# Altium PCB Flight Controller.PcbDoc (part 3 of 3)
Units mm, origin at the board's own origin, x right, y up, seen from the top; angles counter-clockwise.
Board outline 152.4 x 101.6 mm, 22 copper layers (F.Cu, F.Mask, B.Cu, B.Mask, In1.Cu, F.SilkS, In2.Cu, B.SilkS, In3.Cu, F.Adhes, In4.Cu, B.Adhes, F.Paste, B.Paste, Dwgs.User, Cmts.User, Eco1.User, Eco2.User, Edge.Cuts, Margin, B.CrtYd, F.CrtYd); 168 components, 0 nets, 572 pads, 361 vias.
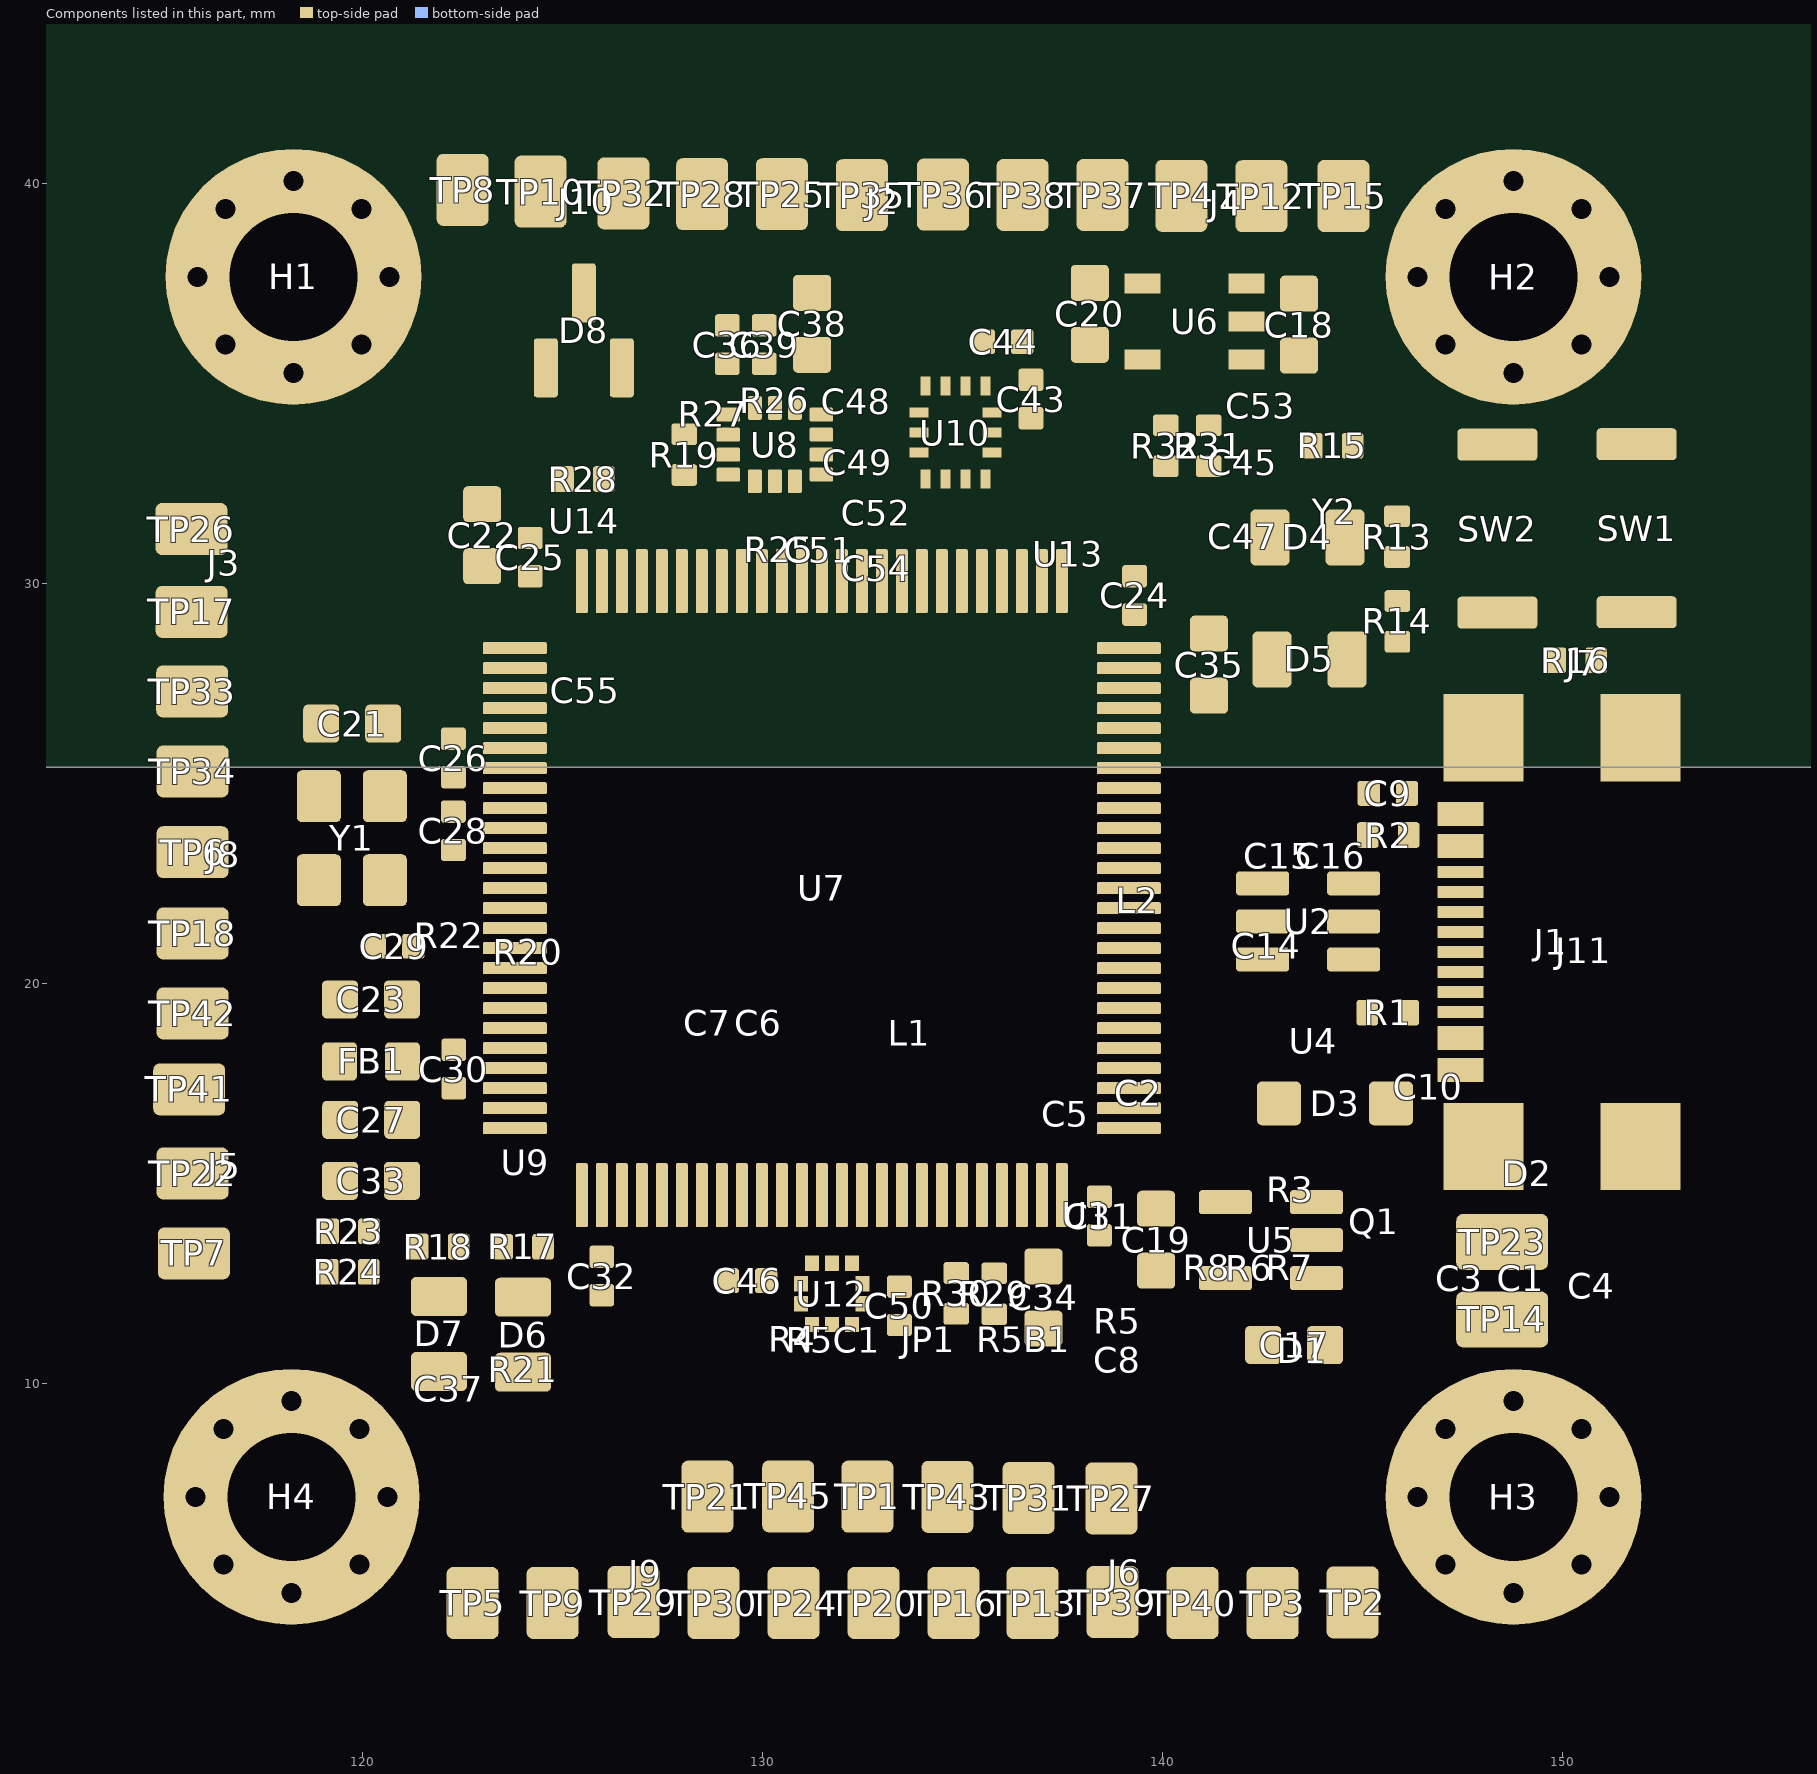
[diagram p14: the components of this part, seen from the top]

## Via types
v1: diameter 0.45, hole 0.25, F.Cu to B.Cu, tented both sides, 361 vias

## Nets (pads, with @x,y where several pads share a name; then routed paths per layer and width w, separated by ;. In a path a pad name is that pad's centre, name@x,y a point inside that pad or via, vN(x,y) a via of type N, cw(c..) or ccw(c..) an arc to the next point about the centre after c; other vN are vias at no path point) (continued)
copper on no net: | length 2032.2
  F.Cu w0.1: v1(122.15,16.82) 122.28,16.95 122.28,17.37 122.29,17.37 122.33,17.41 ; 129.06,12.49 129.13,12.56 ; v1(129.066,31.974) 129.066,32.636 129.14,32.71 ; v1(129.24,11.61) 129.72,11.13 130.88,11.13 131.215,11.465 131.23,11.465 ; v1(129.62,34.81) 129.805,34.625 129.805,34.375 130.305,34.375 ; v1(129.63,12.03) 129.92,11.74 130.73,11.74 130.965,11.975 130.965,11.98 ; 129.98,14.695 129.98,15.51 130.11,15.64 v1(130.11,15.83) ; 131.23,11.33 131.23,11.465 ; 131.23,12.995 131.23,12.9 131.57,12.56 131.96,12.56 132.23,12.83 132.23,12.995 ; 131.73,11.465 131.23,11.465 ; 133.42,12.41 v1(133.95,12.41) ; 134.62,12.97 134.84,12.75
  F.Cu w0.15: 115.665,17.34 116.25,17.34 v1(116.26,17.33) ; 115.74,27.29 116.31,27.29 117.18,26.42 117.18,24.27 v1(117.69,23.76) ; v1@115.75,19.24 115.81,19.24 v1(115.85,19.28) ; v1@115.75,25.29 115.81,25.29 v1(115.85,25.25) ; v1(118.02,14.92) 118.06,14.88 118.06,13.51 118.79,12.78 119.13,12.78 ; v1(118.32,15.96) 118.51,15.77 118.51,14.17 118.89,13.79 119.14,13.79 ; 120.15,12.78 120.16,12.79 ; 121.27,20.87 121.89,20.87 122.89,21.87 123.805,21.87 125.16,21.87 126,22.71 131.38,22.71 131.73,22.36 v1(133.46,22.36) ; 121.38,13.412 121.38,12.695 121.91,12.165 ; v1(121.84,32.91) 121.84,28.535 123.005,27.37 123.805,27.37 ; 122.27,25.145 122.27,24.285 122.685,23.87 123.805,23.87 124.65,23.87 v1(125.28,23.24) ; 122.4,13.412 122.4,13.66 125.051,16.311 126.261,16.311 126.85,16.9 128.34,16.9 129.48,15.76 129.48,14.695 ; 123.49,13.402 123.49,14.355 125.195,16.06 126.43,16.06 126.95,16.58 128.15,16.58 128.98,15.75 128.98,14.695 ; 123.805,19.87 125.7,19.87 126.13,20.3 126.13,21.69 126.5,22.06 130.49,22.06 130.7,21.85 v1(130.7,21.2) ; 123.805,25.37 124.57,25.37 126,23.94 v1(134.07,23.94) ; 123.805,26.37 124.55,26.37 126.57,24.35 132.64,24.35 133.28,24.99 134.01,24.99 134.15,24.85 v1(134.34,24.85) ; 123.805,26.87 124.68,26.87 126.86,24.69 132.06,24.69 132.96,25.59 v1(133.4,25.59) ; 123.805,28.37 124.78,28.37 125.07,28.08 125.07,27.1 127.14,25.03 131.76,25.03 132.83,26.1 135.37,26.1 v1(136.09,25.38) ; 123.815,20.86 123.805,20.87 125.44,20.87 125.73,21.16 125.73,21.82 126.3,22.39 131.14,22.39 131.504,22.026 v1(131.504,21.8) ; 124.01,12.145 124.01,12.9 124.51,13.4 124.51,13.402 ; v1(124.53,14.62) 124.66,14.75 124.66,15.14 125.26,15.74 126.33,15.74 126.48,15.59 126.48,14.695 ; v1(125.37,14.03) 125.48,14.14 125.48,14.695 ; 125.98,30.045 125.98,29.19 v1(126.02,29.15) ; v1(126.28,31.72) 126.76,31.72 127.48,31 127.48,30.045 ; 126.48,30.045 126.48,28.08 v1(126.84,27.72) ; v1(126.97,15.82) 126.97,14.705 126.98,14.695 ; 126.98,30.045 126.98,28.4 v1(127.77,27.61) ; v1(127.21,13.28) 127.69,13.28 127.98,13.57 127.98,14.695 ; v1(127.47,16.09) 127.48,16.08 127.48,14.695 ; 127.98,30.045 127.98,31.22 128.16,31.4 v1(128.31,31.4) ; 128.48,30.045 128.48,27.48 128.98,26.98 v1(129.62,26.98) ; 128.98,30.045 v1(128.98,31.39) ; v1(129.44,16.53) 130.6,16.53 130.99,16.14 130.99,14.705 130.98,14.695 ; 129.48,30.045 v1(129.48,31.07) ; v1(129.69,32) 129.69,32.14 129.805,32.255 129.805,32.545 ; v1(129.92,28.68) 129.92,28.57 130.2,28.29 130.73,28.29 131.48,29.04 131.48,30.045 ; 129.98,30.045 129.98,30.88 130.805,31.705 130.805,32.545 ; v1(130.02,17.06) 130.72,17.06 131.48,16.3 131.48,14.695 ; v1(130.07,33.18) 130.305,32.945 130.305,32.545 ; 130.48,30.045 130.48,30.87 131.47,31.86 131.47,32.71 ; v1(130.5,28.76) 130.71,28.76 130.98,29.03 130.98,30.045 ; 130.76,4.51 130.77,4.5 130.775,4.5 ; 131.57,34.11 131.47,34.21 132.17,34.91 132.17,35.49 v1(132.2,35.52) ; 131.98,14.695 131.98,15.5 v1(132.29,15.81) ; v1(132.01,22.87) 132.011,22.871 139.154,22.871 139.155,22.87 ; v1(132.45,27.44) 132.9,27.89 134.03,27.89 134.48,28.34 134.48,30.045 ; 132.495,12.565 132.495,12.655 132.87,13.03 134.56,13.03 134.62,12.97 ; 132.775,4.5 133,4.5 v1(133.01,4.51) ; 132.98,14.695 v1(132.98,15.72) ; v1(133.05,28.7) 133.48,29.13 133.48,30.045 ; v1(133.17,23.37) 139.155,23.37 ; v1(133.37,27.47) 133.41,27.51 134.11,27.51 134.98,28.38 134.98,30.045 ; v1(133.51,28.37) 133.98,28.84 133.98,30.045 134.06,29.965 ; 133.907,33.26 133.729,33.081 133.729,31.811 134.37,31.17 135.2,31.17 135.48,30.89 135.48,30.045 ; 133.907,33.76 133.53,33.76 133.17,34.12 133.17,35.84 133.3,35.97 133.62,36.29 134.19,36.29 134.55,36.29 134.7,36.14 134.83,36.01 v1(134.83,35.61) ; 133.907,34.26 133.66,34.26 133.46,34.46 133.46,35.47 133.47,35.48 133.73,35.74 133.97,35.74 134.07,35.74 v1(134.19,35.62) ; v1(133.97,15.73) 133.98,15.72 133.98,14.695 ; 134.07,32.597 134.07,31.89 134.5,31.46 135.45,31.46 135.98,30.93 135.98,30.045 ; v1(134.46,22.36) 137.3,22.36 137.79,21.87 139.155,21.87 ; 134.48,14.695 134.48,15.63 v1(134.7,15.85) ; v1@134.84,13.18 135.48,13.82 135.48,14.695 ; v1(135.11,21.87) 135.25,22.01 137.19,22.01 137.83,21.37 139.155,21.37 ; 135.53,36.03 135.57,35.99 ; 135.57,32.597 135.57,32.31 135.94,31.94 136.66,31.94 137.52,32.8 137.52,34.343 v1(137.59,34.413) ; v1(135.75,21.55) 135.8,21.6 136.48,21.6 136.47,21.6 137.12,21.6 137.85,20.87 139.155,20.87 ; 135.79,12.74 135.79,13.54 135.98,13.73 135.98,14.695 ; v1@135.834,34.26 135.732,34.26 135.915,34.26 v1(135.951,34.224) ; v1(136.1,17.07) 136.1,16.74 136.98,15.86 136.98,14.695 ; v1(136.33,27.055) 136.345,27.055 137.48,28.19 137.48,30.045 ; 136.48,30.045 136.48,31.15 138.05,32.72 138.05,34.813 137.843,35.02 v1(137.66,35.02) ; 136.49,36.03 136.71,35.81 136.71,35.08 136.71,35.07 v1(136.72,35.06) ; v1@136.5,39.7 136.5,38.99 137.29,38.2 139.77,38.2 140.41,37.56 140.41,34.85 140.08,34.52 140.08,33.94 ; v1(136.58,21.07) 137.23,21.07 137.39,20.91 137.93,20.37 139.155,20.37 ; v1@136.723,34.922 v1@136.8,35 ; v1(136.73,4.51) 136.74,4.5 v1@136.75,4.5 ; v1(137.66,23.88) 137.88,23.88 137.89,23.87 139.155,23.87 ; v1(137.81,26.47) 138.21,26.87 139.155,26.87 ; v1(137.87,19.86) 137.87,19.32 138.293,18.897 139.128,18.897 139.155,18.87 ; v1(137.927,18.697) 137.927,18.633 138.19,18.37 139.155,18.37 ; v1(138.031,22.319) 138.082,22.37 139.155,22.37 ; v1@138.5,39.7 138.5,38.96 138.92,38.54 140.003,38.54 140.84,37.703 140.84,34.25 141.15,33.94 ; 139.155,16.37 139.175,16.35 140.1,16.35 140.88,15.57 v1(140.88,15.52) ; 139.155,16.87 140.68,16.87 141.57,15.98 141.57,15.53 v1(141.56,15.52) ; 139.155,17.37 141.11,17.37 141.25,17.51 v1(141.32,17.51) ; 139.155,17.87 140.12,17.87 140.123,17.867 140.793,17.867 v1(140.8,17.86) ; 143.845,13.57 144.92,13.57 v1(145.23,13.88) ; 144.75,33.43 147.59,33.43 v1(147.61,33.45) ; 147.445,17.82 147.655,17.61 149.29,17.61 v1(149.3,17.6) ; 150.84,28.07 151.15,28.07 151.85,28.77 151.85,29.27 151.85,29.57 151.62,29.8 151.54,29.88 v1(151.04,29.88)
  F.Cu w0.157: 139.155,25.87 139.805,25.87 139.83,25.895 140.145,25.895 140.45,25.59 140.45,21.75 140.81,21.39 141.34,21.39 142.14,20.59 ; 139.155,26.37 139.805,26.37 139.83,26.345 140.217,26.345 140.81,25.752 140.81,21.9 140.96,21.75 141.4,21.75 142.14,22.49 142.502,22.49 ; 144.778,20.59 145.14,20.59 145.9,21.35 147.365,21.35 147.4,21.315 ; 144.778,22.49 145.14,22.49 145.92,21.71 147.385,21.71 147.445,21.77 148.27,21.77 148.49,21.55 148.49,21.04 148.22,20.77 147.445,20.77 ; 146.49,21.34 146.49,20.5 146.72,20.27 147.445,20.27
  F.Cu w0.2: v1(115.67,31.34) 115.68,31.35 v1@115.72,31.35 ; v1@115.725,29.28 115.725,29.345 v1(115.73,29.35) ; v1@115.75,21.24 v1(115.76,21.23) ; v1@115.78,13.24 115.804,13.24 v1(115.823,13.259) ; 118.905,22.57 119.495,23.16 v1(119.68,23.16) ; v1(118.96,26.5) 118.965,26.495 v1@118.965,26.485 ; 119.422,18.04 119.435,18.052 119.435,19.59 119.74,19.59 120.19,20.04 v1(120.19,20.21) ; 119.435,15.055 119.64,15.26 v1(119.64,15.31) ; 119.44,16.58 119.86,16.58 v1(120.07,16.37) ; v1@120.31,20.92 120.34,20.92 v1(120.37,20.89) ; 120.55,26.52 120.515,26.485 120.515,24.71 120.555,24.67 120.565,24.66 v1(121.49,24.66) ; 120.985,15.055 120.99,15.06 120.99,16.58 120.997,16.587 120.997,18.04 121.287,18.33 122.28,18.33 122.32,18.37 123.805,18.37 123.805,18.87 ; v1(121.39,10.3) 121.51,10.3 121.52,10.29 121.91,10.29 ; v1(122.02,23.42) 122.115,23.325 122.27,23.325 122.315,23.37 123.805,23.37 ; v1(122.13,15.43) 122.45,15.43 122.6,15.58 122.6,16.54 122.93,16.87 123.805,16.87 ; v1(122.28,26.64) 122.28,26.115 122.27,26.105 122.505,25.87 123.805,25.87 ; 122.99,31.97 v1(122.99,32.45) ; 123.24,30.17 122.99,30.42 123.935,30.42 124.19,30.165 125.11,30.165 125.36,30.165 125.48,30.045 ; 123.805,17.37 v1(126.12,17.37) ; 124.01,10.27 125.04,10.27 v1(125.3,10.53) ; 124.19,31.125 v1(124.19,32.65) ; v1(124.808,34.771) 124.939,34.771 125.295,34.415 125.295,33.365 125.01,33.08 125.01,32.6 ; v1(125.23,13.14) 125.245,13.155 125.98,13.155 125.98,14.695 ; 125.98,12.195 126.551,12.195 126.576,12.22 v1(126.81,12.22) ; 126.03,32.6 126.03,33.08 125.78,33.33 125.78,34.41 126.138,34.768 v1(126.283,34.768) ; v1(127.394,32.72) 127.414,32.7 128.04,32.7 ; v1@127.64,27.61 v1(127.77,27.61) ; 128.04,33.72 129.13,33.72 129.14,33.71 ; v1(128.26,12.63) v1@128.3,12.59 ; v1(128.28,13.24) 128.32,13.2 129.9,13.2 130.09,13.01 130.09,12.56 130.17,12.48 130.965,12.48 ; v1(128.6,7.13) 128.62,7.15 v1@128.62,7.16 ; 129.117,36.44 129.117,36.897 v1(129.12,36.9) ; 129.14,34.21 129.14,35.457 129.117,35.48 130.027,35.48 130.047,35.5 131.032,35.5 131.237,35.705 ; v1@130.04,36.44 130.04,36.47 v1(130.06,36.49) ; v1(130.3,6.53) 130.35,6.58 130.35,7.16 130.355,7.165 130.64,7.165 ; 130.805,34.375 130.805,34.515 131.237,34.947 131.237,35.705 ; v1(131.22,37.27) 131.235,37.255 v1@131.237,37.255 ; 131.73,12.995 131.73,13.32 131.86,13.45 133.92,13.45 v1(133.91,13.44) ; 132.495,12.48 132.495,12.565 ; 134.84,12.75 v1@134.84,13.18 ; 135.53,36.03 135.53,36.73 135.58,36.78 ; 135.57,35.99 135.57,34.922 135.908,34.922 136.71,34.12 136.71,33.57 136.4,33.26 135.732,33.26 ; v1(136.02,9.145) 136.086,9.145 136.645,8.586 136.645,7.135 136.65,7.13 ; 136.48,14.695 136.48,13.455 137.02,12.915 ; 137.02,11.365 137.02,11.47 137.225,11.675 v1(137.33,11.675) ; v1(137.37,37.53) 137.395,37.505 138.18,37.505 ; 137.72,27.7 138.39,28.37 139.155,28.37 ; 138.42,13.695 138.496,13.695 138.85,14.049 v1(138.85,14.066) ; v1(139.11,30.93) 139.3,30.74 139.3,30.17 ; 139.155,27.37 140.58,27.37 141.02,26.93 ; 139.5,35.59 138.545,35.59 138.18,35.955 137.355,36.78 135.58,36.78 ; v1(142.02,30.96) 142.2,31.14 142.683,31.14 ; 142.1,36.54 142.54,36.54 v1(142.58,36.5) ; 142.14,20.59 142.502,20.59 ; 142.47,39.67 v1(142.47,40.09) ; 142.502,21.54 142.813,21.54 143.51,20.843 143.51,18.92 143.87,18.56 145.69,18.56 ; 142.512,10.952 143.073,10.952 v1(143.1,10.98) ; v1(142.75,4.28) v1@142.75,4.5 ; v1(143.033,29.093) 142.733,28.792 142.733,28.09 142.76,28.09 143.23,27.62 143.23,26.27 143.27,26.23 v1(143.43,26.23) ; 143.315,35.59 143.41,35.685 144.965,35.685 145.39,35.26 v1(145.46,35.26) ; 143.41,37.235 143.41,36.705 v1(143.542,36.573) ; v1(143.72,33.85) 143.73,33.84 143.73,33.43 ; v1(144.41,24.87) 143.82,24.28 143.82,21.87 144.15,21.54 144.778,21.54 144.985,21.54 v1(145.14,21.695) ; 144.578,30.94 145.66,30.94 145.87,30.73 145.87,30.44 ; 144.608,28.19 144.948,28.53 145.87,28.53 ; 145.12,19.26 145.18,19.26 v1(146.09,20.17) ; 145.71,16.99 145.71,18.54 145.69,18.56 ; 146.08,19.08 146.08,19.2 146.14,19.26 146.14,19.52 146.39,19.77 147.445,19.77 ; 146.08,23.63 146.15,23.56 146.15,23.21 146.59,22.77 147.445,22.77 ; 146.15,24.78 148.83,24.78 148.99,24.62 148.99,23.8 148.61,23.42 ; 147.4,21.315 147.445,21.27 ; 147.445,18.62 147.385,18.56 145.69,18.56 ; 147.445,24.22 148.38,24.22 v1(148.39,24.23) ; 148.49,13.53 v1(148.49,14.29) ; v1@151.85,33.47 151.85,33.44 v1(151.86,33.43) ; 131.237,35.705 131.495,35.705 132.57,36.78 135.58,36.78
  F.Cu w0.3: 120.16,12.79 120.16,13.79 ; 120.555,22.57 122.66,22.57 122.96,22.87 123.805,22.87 ; 132.23,10.3 132.23,11.465 ; 132.495,11.98 132.495,11.73 132.23,11.465 ; 132.62,7.16 132.625,7.155 ; 133.42,11.45 132.245,11.45 132.23,11.465 ; 135.79,11.72 136.25,12.18 137.62,12.18 137.84,12.4 137.84,13.5 137.48,13.86 137.48,14.695 137.52,14.655 138.42,14.655 ; 146.11,24.74 146.15,24.78 ; 147.445,18.62 148.66,18.62 149.67,19.63 149.67,22.36 148.61,23.42 147.445,23.42
  F.Cu w0.4: 118.905,24.67 120.555,24.67 ; v1(127.83,25.43) 127.94,25.54 131.47,25.54 132.46,26.53 136.7,26.53 137.72,27.55 137.72,27.7 ; 139.155,28.37 139.1,28.425 139.1,28.88 139.77,29.55 140.06,29.55 ; 139.838,12.807 140.025,12.62 ; 141.15,32.92 140.08,32.92 140.08,29.57 140.06,29.55 ; 142.1,35.59 143.315,35.59 ; 142.77,16.85 142.91,16.99 ; 144.063,10.837 144.063,10.952 ; 145.87,31.46 147.13,31.46 147.36,31.23 v1(147.36,30.87) ; 149.82,28.07 149.82,28.98 149.54,29.26 148.37,29.26 147.98,29.65 140.16,29.65 140.06,29.55
  F.Cu w0.5: 132.625,7.155 134.62,7.155 ; 133.42,11.45 133.7,11.73 134.84,11.73 134.85,11.72 135.79,11.72 ; v1(140.47,39.68) 140.47,39.22 141.41,38.28 142.1,38.28 ; 142.1,37.49 142.1,38.28 ; v1(145.46,35.26) 145.44,35.26 144.69,36.01 144.69,37.66 144.07,38.28 142.1,38.28
  F.Cu w0.6: v1(127.57,12.71) 127.57,11.38 128.65,10.3 132.75,10.3 138.04,10.3 139.838,12.097 ; 138.72,7.115 138.955,7.115 139.838,7.997 139.838,12.097 ; 139.838,12.807 139.838,12.097 ; 140.025,12.62 141.57,12.62 ; 142.91,16.99 143.59,16.99 143.845,16.735 143.845,16.01 ; v1(143.77,9.66) 144.063,9.952 144.063,10.952 144.063,12.402 143.845,12.62 143.18,12.62 142.67,13.13 142.67,14.02 143.17,14.52 143.845,14.52 143.845,16.01 ; v1(144.97,16.02) 144.96,16.01 143.845,16.01
  F.Cu w1: v1(146.22,11.13) 146.22,11.15 146.66,11.59 148.49,11.59
  B.Cu w0.1: 134.57,31.6 134.7,31.73 135.235,31.73 v1@135.247,31.717 ; 134.73,31.72 134.732,31.717 v1@135.247,31.717 ; v1(135.35,31.86) 135.208,31.717 134.77,31.717 v1@135.247,31.717 ; v1(138.98,33.33) 138.98,33.14 139.103,33.017 140.51,33.017 ; v1(140.48,15.06) 142.12,15.06 142.33,14.85 142.33,13.56 142.16,13.39 143.18,13.39 ; 142.93,34.43 144.03,34.43 v1(144.04,34.42) ; 143.44,32.9 143.44,33.57 v1(143.72,33.85) ; v1@148.528,20.3 148.578,20.3 v1(148.588,20.31) ; 148.528,21.3 148.905,21.3 v1(148.915,21.31)
  B.Cu w0.15: v1(117.69,23.76) 117.73,23.72 118.322,23.72 ; v1(117.98,24.7) 118,24.72 118.47,24.72 ; v1(118.06,16.94) 118.08,16.92 118.48,16.92 ; 118.322,22.72 117.8,22.72 115.85,24.67 v1(115.85,25.25) 116.4,25.8 117.16,25.8 123.6,32.24 128.29,32.24 130.11,34.06 130.3,34.06 ; 118.332,14.92 117.28,14.92 115.86,16.34 115.86,19.29 117.21,20.64 118.87,20.64 120.44,22.21 120.44,28.52 123.62,31.7 126.26,31.7 v1(126.28,31.72) ; v1@118.332,15.92 117.13,15.92 116.26,16.79 116.26,19.03 117.43,20.2 119.09,20.2 120.85,21.96 120.85,28.3 123.77,31.22 128.11,31.22 128.29,31.4 v1(128.31,31.4) ; v1@118.47,32.01 118.49,32.01 v1(118.52,32.04) ; v1@120.46,13.92 v1(120.51,13.87) ; 122.15,9.13 122.15,8.85 v1(122.16,8.84) ; 122.165,18.72 122.81,18.075 122.81,16.99 124.53,15.27 v1(124.53,14.62) ; 122.165,19.13 122.17,19.135 122.17,20.68 122.165,20.675 ; v1(122.17,21.75) 122.17,21.7 122.71,21.7 123.63,20.78 123.63,20.6 ; 123.4,29.01 123.34,29.07 123.34,29.69 124.36,30.71 ; 123.435,11.51 123.66,11.51 124.08,11.09 124.08,10.49 124.23,10.34 124.53,10.34 ; 123.435,18.72 123.45,18.705 123.45,17.18 124.37,16.26 127.3,16.26 v1(127.47,16.09) ; 124.38,30.71 127.37,30.71 128.09,29.99 128.09,28.73 128.93,27.89 132.95,27.89 v1(133.37,27.47) ; 124.65,20.78 124.65,18.775 124.705,18.72 ; 124.705,11.51 124.705,14.195 126.21,15.7 126.33,15.82 v1(126.97,15.82) ; 125.975,11.51 125.975,12.845 126.41,13.28 v1(127.21,13.28) ; v1(126.08,28.64) 126.08,28.97 v1@126.18,29.07 ; 126.18,27.46 126.04,27.32 126.41,26.95 v1(126.86,26.95) ; 126.445,6.96 126.55,7.065 126.55,10.19 128.83,12.47 128.83,15.6 129.44,16.21 v1(129.44,16.53) ; 127.4,34.02 127.7,33.72 128.76,33.72 ; 127.45,29.07 127.45,28.82 128.83,27.44 v1(132.45,27.44) ; 127.695,6.96 127.695,10.745 129.17,12.22 129.17,15.47 130.02,16.32 v1(130.02,17.06) ; v1(128.49,39.51) 128.49,39.28 129.13,38.64 132.33,38.64 132.5,38.47 132.5,37.607 ; 130.42,30.34 131.54,29.22 v1(131.54,28.45) ; 131.77,11.59 131.77,11.99 132.19,12.41 v1(133.95,12.41) ; v1(132.04,28.84) 132.36,29.16 132.36,30.37 ; 132.36,31.76 v1(132.36,33.8) ; v1@132.45,40.01 v1(132.46,40.02) 133.71,40.02 134.53,39.2 135.75,39.2 136.35,38.6 139.84,38.6 140.08,38.36 140.08,37.56 ; v1(132.55,28.43) 132.53,28.45 132.53,28.78 133.508,29.757 134.77,29.757 ; v1(133.4,25.59) 133.67,25.86 136.84,25.86 137.05,26.07 141.37,26.07 141.81,26.51 141.81,28.09 141.443,28.457 140.51,28.457 ; v1(133.91,13.44) 133.951,13.481 135.509,13.481 v1(135.79,13.2) ; 133.997,29.107 134.77,29.107 135.618,29.107 135.92,29.41 135.92,30.71 ; v1(134.07,23.94) 134.78,24.65 137.29,24.65 137.79,25.15 141.79,25.15 142.82,26.18 142.82,28.74 141.152,30.407 140.51,30.407 ; v1(134.34,24.85) 134.5,24.85 134.55,24.9 136.98,24.9 137.58,25.5 141.67,25.5 142.48,26.31 142.48,28.45 141.172,29.757 140.51,29.757 ; v1(134.45,40.07) 134.88,39.64 135.8,39.64 136.54,38.9 140.64,38.9 141.08,38.46 141.08,37.56 ; v1(134.99,8.6) 134.99,8.5 135.46,8.03 135.56,7.93 135.56,7.14 ; v1(136.07,8.56) 136.07,8.22 136.56,7.73 136.56,7.14 ; v1(136.09,25.38) 136.28,25.57 136.904,25.57 137.094,25.76 141.47,25.76 142.14,26.43 142.14,28.16 141.21,29.09 140.527,29.09 140.51,29.107 ; v1(136.46,39.71) 136.59,39.71 137.11,39.19 141.45,39.19 142.08,38.56 142.08,37.56 ; v1(137.07,8.62) 137.56,8.13 137.56,7.14 ; 137.14,15.337 137.14,15.77 137.241,15.871 v1(137.241,16.095) ; v1(138.02,8.55) 138.56,8.01 138.56,7.14 ; v1(138.49,39.61) 138.49,40.13 139.26,40.9 140.84,40.9 143.08,38.66 143.08,37.56 ; 139.56,7.14 139.56,8.13 140.19,8.76 140.19,10.34 140.46,10.61 140.46,11.3 v1(140.49,11.33) ; v1(139.59,14.27) v1@139.6,14.26 ; 141.13,12.41 142.12,12.41 142.16,12.37 ; v1@141.54,7.205 141.54,7.05 v1(141.57,7.02) ; 142,33.5 142.12,33.5 142.52,33.1 v1(142.52,33.02) ; 142.01,30.69 142.01,30.42 v1(142.12,30.31) ; v1(142.02,9.86) 142.038,9.877 142.038,10.81 ; v1(146.49,27.74) 146.53,27.7 148.36,27.7 148.562,27.498 ; v1(146.54,28.47) 148.534,28.47 148.562,28.498
  B.Cu w0.2: v1(117.45,29.97) 117.47,29.95 118.443,29.95 ; v1(117.47,30.95) 118.443,30.95 ; 118.443,28.95 119.1,28.95 119.7,29.55 v1(120.06,29.55) ; v1(121.58,33.8) 121.58,36.38 122.797,37.597 124.08,37.597 124.09,37.607 124.09,37.745 ; v1(122.16,14.25) 122.165,14.245 122.165,10.495 122.36,10.3 123.47,10.3 123.51,10.34 ; v1(122.32,27.29) 122.35,27.32 125.08,27.32 124.92,27.48 124.92,30.13 v1(124.91,30.14) ; v1(124.27,7.45) 124.27,7.41 124.57,7.11 ; v1(124.808,34.771) 125.021,34.771 125.365,35.115 125.365,36.315 125.09,36.59 125.09,37.607 ; 124.96,37.985 124.965,37.99 124.965,37.44 ; v1@125.57,7.2 125.57,7.21 v1(125.59,7.23) ; 126.09,37.565 126.09,37.607 126.09,36.59 125.8,36.3 125.8,35.17 126.202,34.768 v1(126.283,34.768) ; 130.3,35.08 131.255,35.08 131.565,34.77 131.565,33.3 131.605,33.26 ; 130.74,10.58 130.74,10.27 131.44,9.57 138.69,9.57 139.345,10.225 139.345,10.58 139.37,10.605 139.37,11.54 ; v1(130.78,33.43) 130.62,33.27 130.62,32.32 130.42,32.12 130.42,31.36 130.47,31.41 131.42,31.41 ; 131.42,30.35 132.18,31.11 134.718,31.11 134.77,31.057 ; 131.77,10.57 131.77,10.74 132.11,11.08 132.84,11.08 ; 133.115,34.77 133.115,34.565 134.013,33.667 134.77,33.667 ; 133.155,33.26 133.155,33.255 133.392,33.017 134.77,33.017 ; v1(133.3,31.75) 133.39,31.75 134.007,32.367 134.77,32.367 135.772,32.367 135.92,32.22 135.92,30.71 135.618,30.407 134.77,30.407 133.358,30.407 133.32,30.37 ; 134.14,11.08 134.14,10.44 134.62,9.96 138.13,9.96 138.385,10.215 138.385,10.58 138.385,11.505 138.35,11.54 138.35,11.76 139.04,12.45 139.04,13.062 ; 135.44,11.08 136.02,11.08 136.53,10.57 ; 137.02,16.64 136.7,16.64 136.33,16.27 136.33,13.67 136.938,13.062 137.14,13.062 ; 140.51,31.717 141.813,31.717 141.98,31.55 ; 140.51,32.367 141.827,32.367 142,32.54 142.21,32.54 142.89,31.86 144.79,31.86 145.14,32.21 145.14,32.9 ; 140.51,33.667 141.208,33.667 141.97,34.43 ; 141.1,13.4 141.198,13.4 v1(141.67,13.872) ; 142.01,31.64 142.24,31.64 143.18,30.7 143.44,30.7 ; v1(142.05,17.69) 142.148,17.592 142.623,17.592 143.242,17.592 143.71,18.06 v1(143.71,18.15) ; 143.19,14.33 145.08,14.33 v1(145.23,14.48) ; v1(143.77,28.87) v1@143.782,28.857 ; 145.14,30.7 145.14,30.22 v1(145.15,30.21) ; v1(147,12.55) 147.42,12.13 147.42,11.845 ; 148.562,26.498 149.992,26.498 v1(150.44,26.05) ; 148.588,19.31 149.38,19.31 v1(149.74,18.95) ; 148.95,11.85 148.97,11.85 149.47,12.35 v1(149.95,12.35) ; v1@150.71,11.485 150.71,11.47 v1(150.75,11.43)
  B.Cu w0.3: v1(115.75,15.29) 116.01,15.29 116.11,15.19 117.38,13.92 118.48,13.92 v1@120.46,13.92 ; 129.56,7.12 129.57,7.11 ; v1(130.95,18.55) 131.15,18.55 131.28,18.42 ; v1(138.033,17.998) 138.291,17.74 139.09,17.74 ; 142.623,19.492 142.783,19.492 143.365,20.075 143.365,20.93 ; 144.33,15.28 144.36,15.25 ; v1@145.23,15.25 v1(145.24,15.24) ; v1(145.63,16.07) 146.195,16.635 146.64,16.635 ; v1(146.7,30.82) v1@146.71,30.83
  B.Cu w0.4: 148.488,29.5 148.488,29.882 148.49,29.885 v1(148.49,30.12)
  B.Cu w0.5: 128.61,19.785 128.645,19.82 ; v1(130.48,39.71) 130.48,39.53 130.63,39.38 133.42,39.38 134.48,38.32 134.48,37.627 134.5,37.607 ; 139.04,15.337 139.39,15.687 139.39,16.78 ; 141.97,34.43 141.97,34.88 142.25,35.16 145.36,35.16 v1(145.46,35.26) ; 143.19,15.35 143.26,15.28 144.33,15.28 ; 144.36,15.25 v1@145.23,15.25 ; 146.23,15.28 146.26,15.25 ; 147.42,13.395 147.43,13.385 ; v1(149.93,15.25) 150.76,15.25
  B.Cu w0.6: 144.08,37.56 144.09,37.57 144.31,37.57 144.68,37.2 144.68,36.02 146.71,33.99 v1(146.71,32.18) v1@146.71,30.83
  B.Cu w0.7: 128.61,18.235 130.635,18.235 v1(130.95,18.55) 130.96,18.54 130.96,11.82 130.74,11.6 130.3,11.6 129.66,10.96 129.66,9.53 v1(129.69,9.5) 129.645,9.455 129.645,7.205 129.56,7.12 ; 135.71,18.42 136.595,18.42 137.98,17.035 138.09,16.925 138.09,15.337 ; 139.81,20.18 139.81,20.04 ; 139.82,20.03 139.81,20.04 ; 139.9,19.95 139.81,20.04 ; 141.805,20.94 141.815,20.93 ; 141.84,20.94 141.85,20.93 ; 144.898,17.592 144.96,17.53 ; 146.26,15.25 147.46,15.25 147.42,15.21
  B.Cu w0.8: v1(115.73,23.18) 117.19,21.72 118.47,21.72 ; 139.81,24.1 139.92,23.99 v1(142.9,23.99) v1(144.3,23.99) 146.907,23.99 148.588,22.31 ; v1(141.48,22.69) 141.48,22.657 141.732,22.405 142.9,22.405 ; 144.2,22.405 145.535,22.405 145.82,22.69 v1(145.82,22.7) ; v1(144.783,19.861) 144.898,19.746 144.898,19.492 ; 144.898,17.592 144.898,18.542
  B.Cu w1: 139.39,16.78 139.63,16.54 144.08,16.54 144.898,17.357 144.898,17.592 145.543,17.592 146.135,18.185 146.64,18.185 147.595,18.185 148.1,17.68 148.1,15.89 147.46,15.25 ; 139.82,20.03 140.915,20.03 ; 141.815,20.93 140.915,20.03 ; 142.623,18.542 141.752,18.542 141.26,19.035 141.26,19.685 140.915,20.03 ; 147.42,13.395 147.42,15.21 ; 147.43,13.385 150.71,13.385
  F.SilkS w0.254: 114.882,22.472 116.532,22.472 116.782,22.722 116.782,26.622 116.782,29.872 116.582,30.072 114.982,30.072 ; 125.75,40.6 125.75,38.95 126,38.7 127.9,38.7 131.15,38.7 131.35,38.9 131.35,40.5 ; 131.7,40.6 131.7,39.1 131.7,38.9 131.9,38.7 140.1,38.7 140.9,38.7 141.1,38.7 141.3,39 141.3,40.6 ; 121.68,17.3 121.69,18.77 118.76,18.77 118.76,17.35 121.68,17.3 ; 121.68,17.3 118.75,17.3 118.75,15.88 121.68,15.88 121.68,17.3 ; 118.74,14.36 118.74,15.78 121.67,15.78 121.67,14.36 118.74,14.36 ; 118.75,18.89 118.75,20.31 121.68,20.31 121.68,18.89 118.75,18.89 ; 122.29,29.73 123.71,29.73 123.71,32.66 122.29,32.66 122.29,29.73 ; 130.53,35.035 131.95,35.035 131.95,37.965 130.53,37.965 130.53,35.035 ; 136.32,10.68 137.74,10.68 137.74,13.61 136.32,13.61 136.32,10.68 ; 137.48,35.265 138.9,35.265 138.9,38.195 137.48,38.195 137.48,35.265 ; 139.13,12.1 140.55,12.1 140.55,15.03 139.13,15.03 139.13,12.1 ; 140.45,26.49 141.87,26.49 141.87,29.42 140.45,29.42 140.45,26.49 ; 141.84,10.24 141.84,11.66 144.77,11.66 144.77,10.24 141.84,10.24 ; 142.71,35 144.13,35 144.13,37.93 142.71,37.93 142.71,35
  In2.Cu w0.15: v1(117.45,29.97) 118.17,30.69 120.51,30.69 125.07,26.13 136.89,26.13 137.23,26.47 v1(137.81,26.47) ; v1(117.47,30.95) 117.53,31.01 120.67,31.01 125.27,26.41 135.7,26.41 136.33,27.04 v1(136.33,27.055) ; v1(117.69,23.76) 117.72,23.73 118.27,23.73 120.87,21.13 120.87,16.69 v1(122.13,15.43) ; 121.84,32.96 v1(121.84,32.91) 122.21,33.28 122.21,34.37 123.15,35.31 131.99,35.31 v1(132.2,35.52) ; v1(126.81,4.6) 126.81,4.66 128.046,5.896 128.446,5.896 132.76,10.21 140.46,10.21 140.89,10.64 140.89,15.51 v1(140.88,15.52) ; v1(126.84,27.72) 126.67,27.89 126.67,31.43 129.61,34.37 131.71,34.37 133.01,35.67 133.01,39.61 132.6,40.02 v1(132.46,40.02) ; v1(127.77,27.61) 127.07,28.31 127.07,31.14 129.89,33.96 131.81,33.96 134.49,36.64 134.49,40.03 v1(134.45,40.07) ; v1(128.72,4.55) 129.73,5.56 130.08,5.56 134.3,9.78 140.56,9.78 141.27,10.49 141.27,15.23 v1(141.56,15.52) ; v1(128.98,31.39) 129.1,31.51 131.65,31.51 136.58,36.44 136.58,39.59 v1(136.46,39.71) ; v1(129.48,31.07) 131.79,31.07 138.49,37.77 v1(138.49,39.61) ; v1(129.62,26.98) 129.7,26.9 132.69,26.9 133.87,26.9 135,28.03 135.28,28.31 135.28,30.12 135.28,30.59 136.29,31.6 136.61,31.92 139.72,31.92 140.14,31.92 141.44,33.22 141.64,33.42 144.88,33.42 147.58,33.42 v1(147.61,33.45) ; v1(130.7,21.2) 131.85,21.2 132.8,20.25 132.8,18.5 136.13,15.17 139.73,15.17 140.19,14.71 140.19,11.63 v1(140.49,11.33) ; v1(131.504,21.8) 131.996,21.8 133.3,20.496 133.3,18.65 136.27,15.68 140.03,15.68 140.48,15.23 v1(140.48,15.06) ; 148.548,20.35 v1(148.588,20.31)
  In2.Cu w0.3: v1(115.73,23.18) 115.72,23.17 115.74,23.17 ; v1(145.24,15.24) 145.25,15.25
  In2.Cu w0.5: v1(130.48,39.71) 130.48,40.27 131.01,40.8 139.35,40.8 v1(140.47,39.68) ; 145.25,15.25 145.32,15.18 149.86,15.18 v1(149.93,15.25)
  In2.Cu w0.6: 133.27,31.67 134.17,32.57 139.75,32.57 v1(141.97,34.79) ; v1(133.77,7.155) 135.115,5.81 141.61,5.81 143.77,7.97 v1(143.77,9.66)
  In2.Cu w0.8: 115.74,23.17 117.195,21.715 117.195,13.335 119.135,11.395 126.935,11.395 128.83,9.5 v1(129.69,9.5)
  B.SilkS w0.254: 141.56,32.1 142.46,32.1 ; 141.56,33.95 143.34,33.95 143.34,34.88 141.56,34.88 141.56,30.28 142.46,30.27 142.46,33.95 ; 149.66,14.09 151.69,14.12 151.69,10.74 149.74,10.74 149.66,14.09 ; 149.66,14.09 149.66,11.16 148.24,11.16 148.24,14.09 149.66,14.09 ; 121.715,8.71 122.605,8.71 122.605,10.52 121.715,10.52 121.715,8.71 ; 124.66,26.875 126.47,26.875 126.47,27.765 124.66,27.765 124.66,26.875 ; 127.91,17.55 129.33,17.55 129.33,20.48 127.91,20.48 127.91,17.55 ; 129.17,17.55 130.59,17.55 130.59,20.48 129.17,20.48 129.17,17.55 ; 146.71,11.16 148.13,11.16 148.13,14.09 146.71,14.09 146.71,11.16
  In3.Cu w0.1: v1(129.63,12.03) 129.64,12.04 129.64,15.53 129.9,15.79 130.07,15.79 v1(130.11,15.83) ; v1(140.8,17.86) 140.902,17.962 140.902,18.652 143.57,21.32 148.905,21.32 v1(148.915,21.31) ; v1(141.32,17.51) 141.32,18.41 143.84,20.93 147.85,20.93 148.47,20.31 v1(148.588,20.31)
  In3.Cu w0.15: v1(122.65,39.53) 122.74,39.53 123.58,38.69 123.58,25.72 125.93,23.37 v1(133.17,23.37) ; v1(122.76,4.73) 122.76,19.62 126.01,22.87 v1(132.01,22.87) ; v1(129.69,32) 129.91,31.78 129.91,28.7 129.92,28.69 v1(129.92,28.68) ; v1(130.07,33.18) 130.31,32.94 130.31,28.95 v1(130.5,28.76) ; v1(130.76,4.76) 130.75,4.77 130.75,16.82 131.56,17.63 131.56,19.19 134.46,22.09 v1(134.46,22.36) ; v1(132.29,15.81) 132.18,15.7 132.18,9.54 133.12,8.6 v1(134.99,8.6) ; v1(132.98,15.72) 132.98,15.67 132.62,15.31 132.62,9.8 133.29,9.13 135.37,9.13 135.94,8.56 v1(136.07,8.56) ; v1(133.01,4.51) 132.25,4.51 131.07,5.69 131.07,16.71 131.93,17.57 131.93,19.13 134.67,21.87 v1(135.11,21.87) ; v1(133.05,28.7) 133.52,29.17 133.53,29.17 134.01,29.65 134.01,35.44 v1(134.19,35.62) ; v1(133.46,22.36) 134.03,22.93 138.57,22.93 139.52,23.88 139.52,26.48 142.67,29.63 150.79,29.63 v1(151.04,29.88) ; v1(133.51,28.37) 135.86,28.37 137.59,30.1 v1(137.59,34.413) ; v1(133.97,15.73) 133.97,15.7 133.06,14.79 133.06,10.32 133.75,9.63 136.12,9.63 137.07,8.68 v1(137.07,8.62) ; v1(134.7,15.85) 134.48,15.63 134.48,15.62 133.49,14.63 133.49,10.53 133.92,10.1 136.39,10.1 137.94,8.55 v1(138.02,8.55) ; v1(134.78,4.78) 134.64,4.78 134.35,5.07 132.27,5.07 131.45,5.89 131.45,16.6 132.27,17.42 132.27,18.92 134.69,21.34 135.54,21.34 v1(135.75,21.55) ; v1(134.83,35.61) 137.07,35.61 v1(137.66,35.02) ; v1(134.84,13.08) 138.74,9.18 138.74,5.82 138.74,4.57 v1(138.75,4.56) ; v1(135.79,13.2) 135.79,12.65 139.09,9.35 139.09,5.95 140.49,4.55 v1(140.73,4.55) ; v1(136.58,21.07) 134.89,21.07 132.61,18.79 132.61,17.26 131.76,16.41 131.76,6.06 132.44,5.38 135.86,5.38 v1(136.73,4.51) ; v1(137.66,23.88) 137.65,23.89 137.65,25.04 138.46,25.85 138.46,34.65 143.5,39.69 v1(144.48,39.69) ; v1(137.87,19.86) 139.353,19.86 140.31,20.817 140.31,25.57 143.21,28.47 v1(146.54,28.47) ; v1(137.927,18.697) 137.927,18.811 138.226,19.11 139.26,19.11 140.75,20.6 140.75,25.24 143.41,27.9 146.33,27.9 v1(146.49,27.74) ; v1(138.031,22.319) 137.47,21.758 137.47,16.63 137.79,16.31 137.79,11.786 144.71,4.866 v1(144.71,4.63)
  In3.Cu w0.2: v1(124.27,7.45) 124.221,7.499 124.221,8.781 126.01,10.57 126.01,17.26 v1(126.12,17.37) ; v1(128.49,39.51) 128.49,36.88 130.78,34.59 130.78,33.506 130.704,33.43 v1(130.78,33.43)
  Edge.Cuts w0.254: 113.22,7.155 ccw(c118.22,7.155) 118.22,2.155 148.795,2.155 ccw(c148.795,7.155) 153.795,7.155 153.77,37.63 ccw(c148.77,37.63) 148.77,42.63 118.295,42.655 ccw(c118.295,37.655) 113.295,37.655 113.22,7.155
  other v1: 124.75,4.5 130.33,8.74 120.09,10.55 120.71,10.54 118.06,11.22 128.89,11.23 152.19,11.4 152.74,11.43 117.68,11.67 152.19,11.98 152.74,11.98 117.29,12.07 116.91,12.44 152.19,12.55 152.73,12.55 152.18,13.14 152.71,13.14 130.17,13.53 152.19,13.73 152.75,13.73 128.05,15.93 132.73,16.49 133.29,16.49 133.85,16.49 133.02,17.07 133.58,17.07 129.04,17.09 143.89,17.61 118.06,17.97 130.95,18.01 127,18.2 127.6,18.2 118.06,18.53 140.4,18.6 127,18.9 127.6,18.9 130.95,19.05 118.06,19.09 137.06,19.17 127,19.5 127.6,19.5 121.31,19.57 130.95,19.55 118.07,19.63 137.04,19.79 152.18,20.04 151.49,20.06 137.06,20.39 152.19,20.6 151.5,20.62 126.66,20.79 127.31,20.79 128.01,20.79 128.71,20.79 129.46,20.79 152.19,21.17 151.5,21.19 126.66,21.44 127.31,21.44 128.01,21.44 128.71,21.44 129.46,21.44 151.51,21.75 152.2,21.73 121.33,21.77 150.44,22.71 150.45,23.27 121.44,23.43 150.98,23.81 150.45,23.84 134.8,23.9 135.4,23.9 136,23.9 136.6,23.9 115.59,24.31 150.98,24.38 116.76,24.41 150.46,24.4 135.45,25.3 150.43,25.48 145.04,25.69 145.74,25.69 145.03,26.25 145.73,26.25 145.01,26.85 145.71,26.85 127.49,26.94 128.11,26.96 143.782,27.162 117.67,27.33 136.31,27.72 118.15,27.74 119.95,27.75 118.58,28.11 136.32,28.21 136.89,28.27 138.01,28.63 129.3,28.7 136.9,28.76 138.02,29.12 150.54,30.91 151.16,30.91 121.37,31.02 150.53,31.47 151.15,31.47 150.51,32.07 151.13,32.07 116.87,32.92 117.5,32.92 118.13,32.92 118.76,32.92 132.38,33.19 119.7,33.5 116.88,33.55 117.51,33.55 118.14,33.55 118.77,33.55 139,33.83 139.28,34.35 139.29,34.84 128.13,35.94 139.59,36.345 128.14,36.44 138.22,36.75 135.39,37.3 136.035,37.3 129.475,37.54 130.12,37.54 135.39,37.78 136.035,37.78 129.485,38.19 130.13,38.19 135.39,38.37

## Polygon pours and split planes (outlines as drawn)
no net on F.Cu "F.Cu-" (solid, remove dead copper, pour order 6): 112,42 118.27,45 149,45 155,42 155,5 151,1 118.27,1 112,4
no net on In3.Cu "In3.Cu-" (solid, remove dead copper, pour order 13): 111,43 118.27,46 149,46 155,43 155,3 151,0 118,0 111,3 111,4
no net on B.Cu "B.Cu--1" (solid, remove dead copper, pour order 10): 142.3,6.3 144.3,6.3 145.1,8 145.1,9.5 145.5,9.9 146,9.9 146.5,10.6 146.5,13.3 146.2,13.5 144.8,13.5 144.2,12.9 143,12.9 142.7,12.7 142.7,12.1 143,11.9 143.4,11.9 143.7,11.6 143.7,10.3 142.7,9.2 142.3,9.2 142.1,9 142.1,6.5
no net on B.Cu "B.Cu-" (solid, remove dead copper, pour order 9): 112,42 118.27,45 149,45 155,42 155,5 151,1 118.27,1 112,4
no net on In4.Cu "In4.Cu-" (solid, remove dead copper, pour order 14): 111,43 118.27,46 149,46 155,43 155,3 151,0 118,0 111,3 111,4
no net on In1.Cu "In1.Cu-" (solid, remove dead copper, pour order 11): 111,43 118.27,46 149,46 155,43 155,3 151,0 118,0 111,3 111,4
no net on In2.Cu "In2.Cu--2" (solid, remove dead copper, pour order 8): 119.32,34.265 128.72,34.265 128.75,12.345 119.35,12.345
no net on In2.Cu "In2.Cu--1" (solid, remove dead copper, pour order 7): 141.9,32.72 150.115,32.715 150.085,15.565 141.825,15.57
no net on In2.Cu "In2.Cu-" (solid, remove dead copper, pour order 12): 111,43 118.27,46 149,46 155,43 155,3 151,0 118,0 111,3 111,4

## Other copper
F.SilkS:
  text "M3" at 121.63,40.947 h0.5
  text "GND" at 123.43,40.948 h0.5
  text "GND" at 125.43,40.948 h0.5
  text "VIDEO" at 127.43,40.948 h0.5
  text "5V" at 130.1,40.949 h0.5
  text "RX" at 131.91,40.951 h0.5
  text "TX" at 134.05,40.951 h0.5
  text "SDA" at 135.769,40.948 h0.5
  text "SCL" at 137.65,40.948 h0.5
  text "5V" at 139.93,40.949 h0.5
  text "GND" at 141.73,40.948 h0.5
  text "M4" at 143.83,40.95 h0.5
  text "CAM" at 127.59,37.798 h0.5
  text "GPS" at 135.63,37.798 h0.5
  text "PWR" at 143,32.047 h0.4
  text "GND" at 114.692,30.8 h0.5 r90
  text "GND" at 114.692,28.6 h0.5 r90
  text "BOOT" at 147.56,27.916 h0.4
  text "RST" at 151.38,27.876 h0.4
  text "PWR" at 144.44,27.047 h0.4
  text "IRC" at 114.692,26.7 h0.5 r90
  text "VTX" at 117.544,25.522 h0.4 r90
  text "VIDEO" at 114.692,24.25 h0.5 r90
  text "VCC" at 114.692,22.55 h0.5 r90
  text "GND" at 114.692,20.4 h0.5 r90
  text "SDA" at 114.692,18.45 h0.5 r90
  text "SCL" at 114.692,16.6 h0.5 r90
  text "3.3V" at 114.693,14.45 h0.5 r90
  text "GND" at 150.704,12.87 h0.4 r90
  text "GND" at 114.692,12.45 h0.5 r90
  text "VBAT" at 150.713,10.77 h0.4 r90
  text "STS2" at 122.62,9.433 h0.4
  text "STS1" at 124.72,9.433 h0.4
  text "GND" at 129.34,6.038 h0.5
  text "GND" at 131.34,6.038 h0.5
  text "5V" at 133.04,6.039 h0.5
  text "5V" at 135.04,6.039 h0.5
  text "GND" at 137.5,6.038 h0.5
  text "3.3V" at 139.62,6.037 h0.5
  text "M2" at 123.346,3.171 h0.5
  text "GND" at 125.51,3.169 h0.5
  text "TX" at 127.23,3.173 h0.5
  text "RX" at 129.3,3.173 h0.5
  text "S4" at 131.335,3.169 h0.5
  text "S3" at 133.385,3.168 h0.5
  text "S2" at 135.385,3.169 h0.5
  text "S1" at 137.335,3.169 h0.5
  text "SCL" at 139.54,3.169 h0.5
  text "SDA" at 141.54,3.169 h0.5
  text "GND" at 143.51,3.169 h0.5
  text "M1" at 145.344,3.173 h0.5
B.SilkS:
  text "GND" at 131.972,36.87 h0.5 r90
  text "5V" at 134.991,36.81 h0.5 r90
  text "C_L" at 125.557,36.785 h0.5 r90
  text "C_H" at 126.597,36.775 h0.5 r90
  text "GND" at 127.562,36.775 h0.5 r90
  text "3.3V" at 124.559,36.764 h0.5 r90
  text "VID" at 132.971,36.76 h0.5 r90
  text "RX" at 140.549,36.765 h0.5 r90
  text "GND" at 139.472,36.73 h0.5 r90
  text "SDA" at 142.512,36.74 h0.5 r90
  text "SCL" at 143.532,36.74 h0.5 r90
  text "5V" at 144.561,36.74 h0.5 r90
  text "TX" at 141.649,36.71 h0.5 r90
  text "GND" at 119.315,32.143 h0.5
  text "CLK" at 119.32,31.158 h0.5
  text "DIO" at 119.32,30.158 h0.5
  text "3V3" at 119.35,29.147 h0.5
  text "5V" at 147.72,29.059 h0.5
  text "TX" at 147.69,28.011 h0.5
  text "RX" at 147.73,27.051 h0.5
  text "GND" at 147.72,26.088 h0.5
  text "GND" at 119.36,24.868 h0.5
  text "IRC" at 119.38,23.858 h0.5
  text "VID_OUT" at 119.41,22.793 h0.5
  text "VCC" at 119.39,21.838 h0.5
  text "5V" at 147.74,21.849 h0.5
  text "TX" at 147.72,20.811 h0.5
  text "RX" at 147.76,19.851 h0.5
  text "GND" at 147.75,18.838 h0.5
  text "GND" at 119.5,17.018 h0.5
  text "SDA" at 119.51,15.988 h0.5
  text "SCL" at 119.51,14.978 h0.5
  text "3V3" at 119.52,14.037 h0.5
  text "12V" at 132.38,10.048 h0.5
  text "9V" at 134.9,10.068 h0.5
  text "VCC" at 129.381,8.09 h0.5 r90
  text "SBUS" at 124.372,8.046 h0.5 r90
  text "GND" at 125.352,8.056 h0.5 r90
  text "GND" at 128.352,8.046 h0.5 r90
  text "M6" at 136.371,8.04 h0.5 r90
  text "GND" at 141.332,8.04 h0.5 r90
  text "VBAT" at 142.391,8.06 h0.5 r90
  text "DJI_RX" at 126.391,8.026 h0.5 r90
  text "DJI_TX" at 127.431,8.026 h0.5 r90
  text "M5" at 135.331,8.02 h0.5 r90
  text "M7" at 137.371,8 h0.5 r90
  text "M8" at 138.373,8.005 h0.5 r90
  text "CURR" at 139.352,7.995 h0.5 r90